# Altium PCB ntk2_agp_UIC1203R_mini.PcbDoc
Units mil, origin at the board's own origin, x right, y up, seen from the top; angles counter-clockwise.
Board outline 4519.84 x 2129.92 mil, 2 copper layers (Top Layer, Top, Bottom Layer, Bottom); 21 components, 37 nets, 174 pads, 64 vias.
Unrouted connection lines stored in the file: 2.
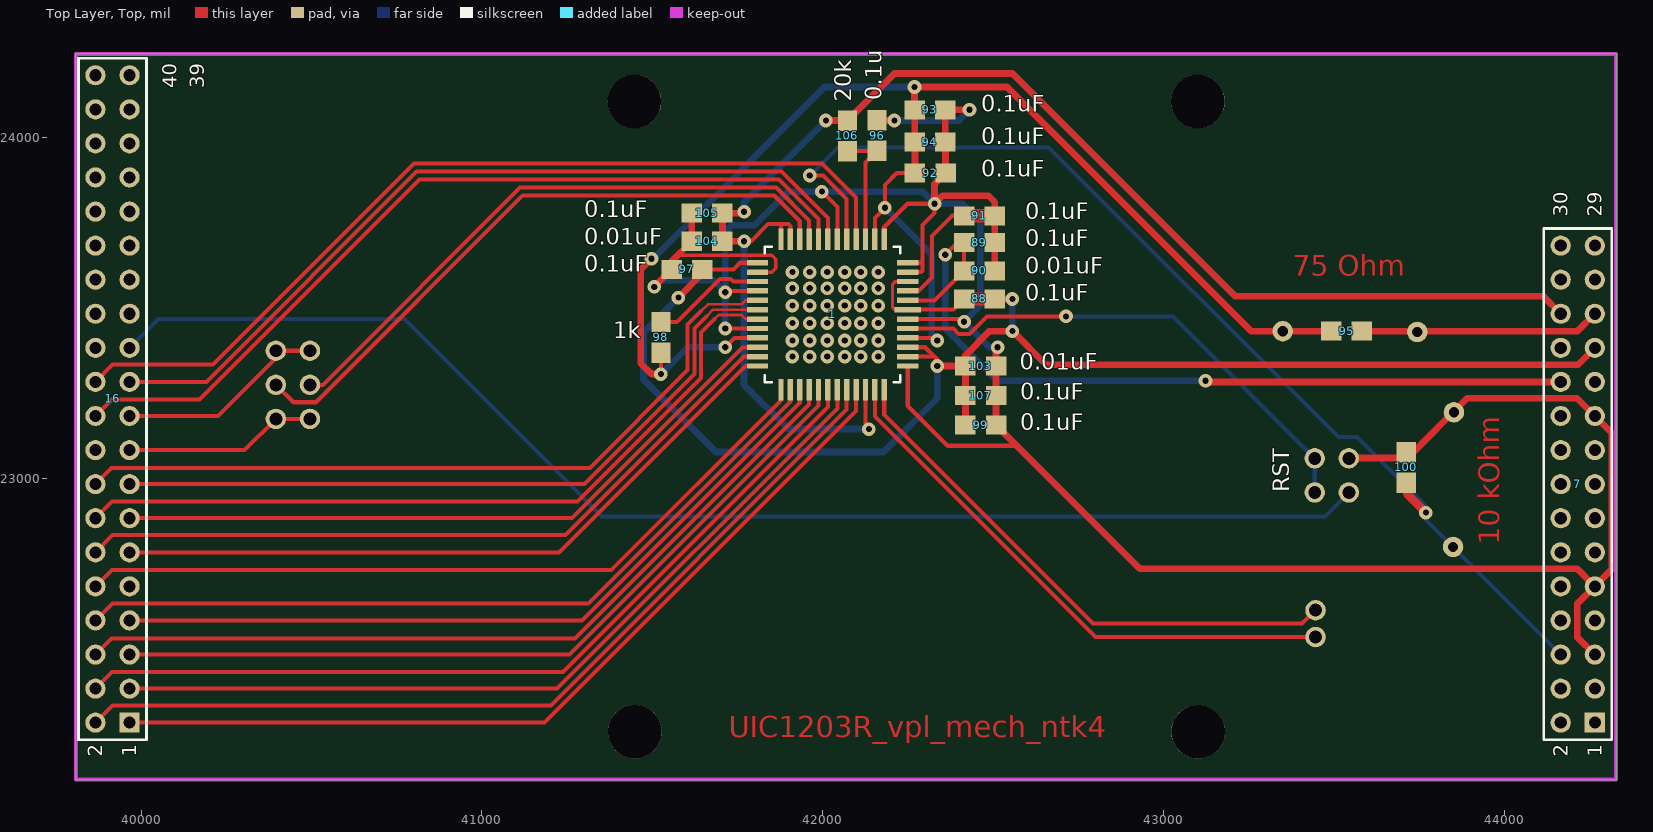
[diagram p0: Top Layer, Top view]
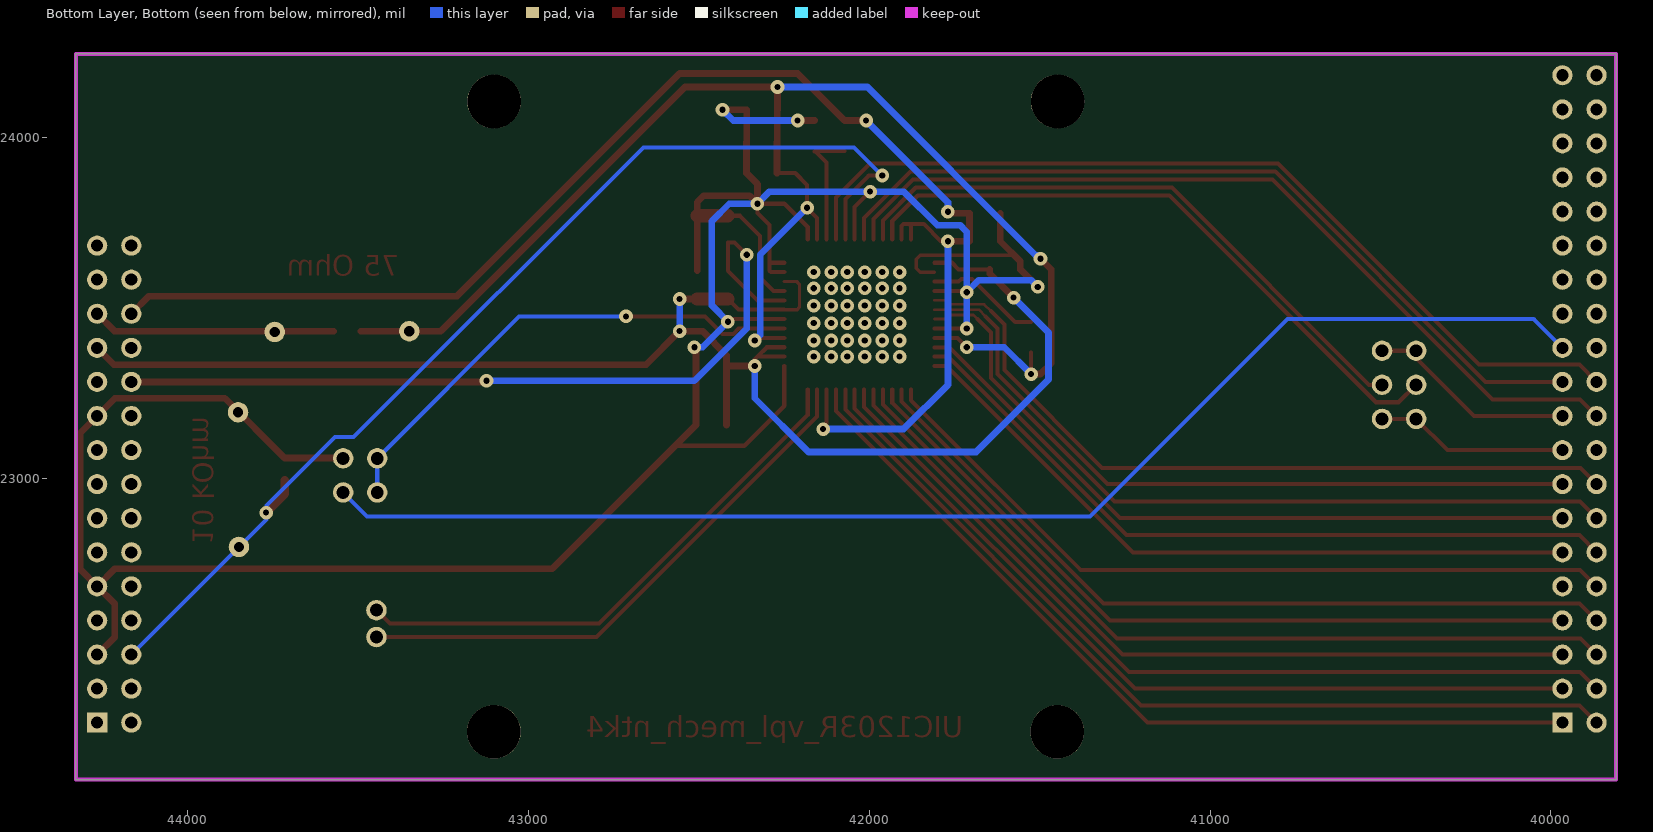
[diagram p1: Bottom Layer, Bottom view, seen from below]

## Layer stack, top to bottom
Top Solder, Top Mask: solder mask 0.4, Solder Resist, Dk 3.5
Top Layer, Top: signal copper 1.4
Dielectric 1: dielectric 12.6, FR-4, Dk 4.8
Bottom Layer, Bottom: signal copper 1.4
Bottom Solder, Bot Mask: solder mask 0.4, Solder Resist, Dk 3.5

## Board outline
39808.5,22116.06 44328.35,22116.06 44328.35,24245.98 39808.5,24245.98

## Design rules (kind name [scope] priority, off if disabled: settings)
Clearance "Clearance_Top Layer, Top_PadToPad" [ExistsOnLayer('Top Layer, Top') And IsPad vs ExistsOnLayer('Top Layer, Top') And IsPad] p1: gap=7.87
Clearance "Clearance_Top Layer, Top_PadToLine" [ExistsOnLayer('Top Layer, Top') And IsPad vs ExistsOnLayer('Top Layer, Top') And IsWire] p2: gap=7.87
Clearance "Clearance_Top Layer, Top_LineToLine" [ExistsOnLayer('Top Layer, Top') And IsWire vs ExistsOnLayer('Top Layer, Top') And IsWire] p3: gap=7.87
Clearance "Clearance_Top Layer, Top_ViaToPad" [ExistsOnLayer('Top Layer, Top') And IsVia vs ExistsOnLayer('Top Layer, Top') And IsPad] p4: gap=7.87
Clearance "Clearance_Top Layer, Top_ViaToLine" [ExistsOnLayer('Top Layer, Top') And IsVia vs ExistsOnLayer('Top Layer, Top') And IsWire] p5: gap=7.87
Clearance "Clearance_Top Layer, Top_ViaToVia" [ExistsOnLayer('Top Layer, Top') And IsVia vs ExistsOnLayer('Top Layer, Top') And IsVia] p6: gap=7.87
Clearance "Clearance_Bottom Layer, Bottom_PadToPad" [ExistsOnLayer('Bottom Layer, Bottom') And IsPad vs ExistsOnLayer('Bottom Layer, Bottom') And IsPad] p7: gap=7.87
Clearance "Clearance_Bottom Layer, Bottom_PadToLine" [ExistsOnLayer('Bottom Layer, Bottom') And IsPad vs ExistsOnLayer('Bottom Layer, Bottom') And IsWire] p8: gap=7.87
Clearance "Clearance_Bottom Layer, Bottom_LineToLine" [ExistsOnLayer('Bottom Layer, Bottom') And IsWire vs ExistsOnLayer('Bottom Layer, Bottom') And IsWire] p9: gap=7.87
Clearance "Clearance_Bottom Layer, Bottom_ViaToPad" [ExistsOnLayer('Bottom Layer, Bottom') And IsVia vs ExistsOnLayer('Bottom Layer, Bottom') And IsPad] p10: gap=7.87
Clearance "Clearance_Bottom Layer, Bottom_ViaToLine" [ExistsOnLayer('Bottom Layer, Bottom') And IsVia vs ExistsOnLayer('Bottom Layer, Bottom') And IsWire] p11: gap=7.87
Clearance "Clearance_Bottom Layer, Bottom_ViaToVia" [ExistsOnLayer('Bottom Layer, Bottom') And IsVia vs ExistsOnLayer('Bottom Layer, Bottom') And IsVia] p12: gap=7.87
Clearance Clearance_Design_HoleToHole [(IsVia Or IsThruPin) vs (IsVia Or IsThruPin)] p13: gap=13
Clearance [All] p14: gap=7.87
PlaneClearance [All] p1: clearance=10
PolygonConnect [All] p1: connectstyle=Relief reliefconductorwidth=10 reliefentries=4 polygonreliefangle="90 Angle" airgapwidth=10
RoutingVias [All] p1: holewidth=28 width=50 viastyle="Through Hole" minholewidth=28 minwidth=50 maxholewidth=28 maxwidth=50
SolderMaskExpansion [All] p1: expansion=4
Width [All] p1: maxlimit=39.37 minlimit=10 preferedwidth=10
28 further rules are at their usual default settings.

## Components (designator, comment, footprint, x,y, rotation, side; value= is the part's Value field where it differs from the comment)
1 "" UIC1203R 42249.61,23495.35 r270 top
7 "" HDR2X15_HDR2X15(Primary) 44265.87,22283.41 r90 top
16 "" HDR2X20_HDR2X20(Primary) 39965.87,22283.41 r90 top
88 "" CHIP_RESISTOR 42414.96,23526.85 r0 top
89 "" CHIP_RESISTOR 42414.96,23692.2 r0 top
90 "" CHIP_RESISTOR 42414.96,23609.53 r0 top
91 "" CHIP_RESISTOR 42414.96,23770.94 r0 top
92 "" CHIP_RESISTOR 42360.63,23896.14 r180 top
93 "" CHIP_RESISTOR 42359.84,24081.97 r180 top
94 "" CHIP_RESISTOR 42359.84,23987.48 r180 top
95 "" CHIP_RESISTOR 43492.64,23432.36 r0 top
96 "" CHIP_RESISTOR 42159.84,24051.26 r270 top
97 "" CHIP_RESISTOR 41556.69,23613.46 r0 top
98 "" CHIP_RESISTOR 41525.2,23369.37 r90 top
99 "" CHIP_RESISTOR 42508.86,23156.77 r180 top
100 "" CHIP_RESISTOR 43712.64,22987.64 r90 top
103 "" CHIP_RESISTOR 42508.86,23330 r180 top
104 "" CHIP_RESISTOR 41615.75,23696.14 r0 top
105 "" CHIP_RESISTOR 41615.75,23778.82 r0 top
106 "" CHIP_RESISTOR 42072.44,24050.47 r270 top
107 "" CHIP_RESISTOR 42508.86,23243.39 r180 top

## Footprints (in the part's own frame and the unit in brackets; to place one, negate y for a bottom-side part, rotate by r counter-clockwise, add the part's x,y. Pads: shape width x height; smd on the part's side, far side on the other; paste and mask are expansions set on the pad)
CHIP_RESISTOR [mil]
  rect 60x55.98 smd: 1(0,0) 2(89.96,0)
HDR2X15_HDR2X15(Primary) [mm]
  rect 1.5x1.5 hole 0.9: 1(0,0)
  round 1.5 hole 0.9: 2(0,2.54) 3(2.54,0) 4(2.54,2.54) 5(5.08,0) 6(5.08,2.54) 7(7.62,0) 8(7.62,2.54) 9(10.16,0) 10(10.16,2.54) 11(12.7,0) 12(12.7,2.54) 13(15.24,0) 14(15.24,2.54) 15(17.78,0) 16(17.78,2.54) 17(20.32,0) 18(20.32,2.54) 19(22.86,0) 20(22.86,2.54) 21(25.4,0) 22(25.4,2.54) 23(27.94,0) 24(27.94,2.54) 25(30.48,0) 26(30.48,2.54) 27(33.02,0) 28(33.02,2.54) 29(35.56,0) 30(35.56,2.54)
  silkscreen extent -1.27,-1.27 36.83,3.81
HDR2X20_HDR2X20(Primary) [mm]
  rect 1.5x1.5 hole 0.9: 1(0,0)
  round 1.5 hole 0.9: 2(0,2.54) 3(2.54,0) 4(2.54,2.54) 5(5.08,0) 6(5.08,2.54) 7(7.62,0) 8(7.62,2.54) 9(10.16,0) 10(10.16,2.54) 11(12.7,0) 12(12.7,2.54) 13(15.24,0) 14(15.24,2.54) 15(17.78,0) 16(17.78,2.54) 17(20.32,0) 18(20.32,2.54) 19(22.86,0) 20(22.86,2.54) 21(25.4,0) 22(25.4,2.54) 23(27.94,0) 24(27.94,2.54) 25(30.48,0) 26(30.48,2.54) 27(33.02,0) 28(33.02,2.54) 29(35.56,0) 30(35.56,2.54) 31(38.1,0) 32(38.1,2.54) 33(40.64,0) 34(40.64,2.54) 35(43.18,0) 36(43.18,2.54) 37(45.72,0) 38(45.72,2.54) 39(48.26,0) 40(48.26,2.54)
  silkscreen extent -1.27,-1.27 49.53,3.81
UIC1203R [mm]
  rect 0.4x2 smd: 1(0,0)
  rect 0.4x1.6 smd: 2(-0.7,0) 3(-1.4,0) 4(-2.1,0) 5(-2.8,0) 6(-3.5,0) 19(-3.5,-11.2) 20(-2.8,-11.2) 21(-2.1,-11.2) 22(-1.4,-11.2) 23(-0.7,-11.2) 24(0,-11.2) 25(0.7,-11.2) 26(1.4,-11.2) 27(2.1,-11.2) 28(2.8,-11.2) 29(3.5,-11.2) 30(4.2,-11.2) 43(4.2,0) 44(3.5,0) 45(2.8,0) 46(2.1,0) 47(1.4,0) 48(0.7,0)
  rect 1.6x0.4 smd: 7(-5.25,-1.75) 8(-5.25,-2.45) 9(-5.25,-3.15) 10(-5.25,-3.85) 11(-5.25,-4.55) 12(-5.25,-5.25) 13(-5.25,-5.95) 14(-5.25,-6.65) 15(-5.25,-7.35) 16(-5.25,-8.05) 17(-5.25,-8.75) 18(-5.25,-9.45) 31(5.95,-9.45) 32(5.95,-8.75) 33(5.95,-8.05) 34(5.95,-7.35) 35(5.95,-6.65) 36(5.95,-5.95) 37(5.95,-5.25) 38(5.95,-4.55) 39(5.95,-3.85) 40(5.95,-3.15) 41(5.95,-2.45) 42(5.95,-1.75)
  silkscreen extent -4.7,-10.65 5.4,-0.55

## Free pads (board coordinates)
  round 60 hole 38: 0(40395.28,23174.88) 0(40395.28,23274.88) 0(40395.28,23374.88) 0(40495.28,23174.88) 0(40495.28,23274.88) 0(40495.28,23374.88) 0(43444.09,22959.13) 0(43444.09,23059.13) 0(43446.46,22534.72) 0(43446.46,22613.46) 0(43544.09,22959.13) 0(43544.09,23059.13)
  round 157.48 hole 157.48 unplated: 0(41447.45,24106.41) 0(41448.35,22256.65) 0(43100.99,24106.41) 0(43101.89,22256.65)
  round 60 hole 30: 0(43745,23430) 0(43852.36,23194.17) 1(43350,23432.36) 1(43850,22799.17)

## Via types
v1: diameter 40, hole 18, Top Layer, Top to Bottom Layer, Bottom, 64 vias

## Nets (pads, with @x,y where several pads share a name; then routed paths per layer and width w, separated by ;. In a path a pad name is that pad's centre, name@x,y a point inside that pad or via, vN(x,y) a via of type N, cw(c..) or ccw(c..) an arc to the next point about the centre after c; other vN are vias at no path point)
1.8V: 1.8 1.27 1.46 7.25 92.2 93.2 94.2 95.1 95.2 98.1 pad.0@43745,23430 pad.1@43350,23432.36 | length 5083.6
  Top Layer, Top w11.81: v1(41525.2,23306.38) 98.1 ; v1(41714.17,23385.12) 41741.73,23412.68 1.27
  Top Layer, Top w12.01: 1.8 42153.15,23765.04 v1(42182.68,23794.57) ; v1@42190.55,23802.44 v1(42182.68,23794.57) ; 1.46 42328.35,23412.68 v1(42336.22,23404.8) ; 92.2 42217.32,23896.14 42182.68,23861.5 v1(42182.68,23794.57)
  Top Layer, Top w19.68: v1(41497.64,23644.96) 41466.14,23613.46 41466.14,23337.87 41497.64,23306.38 v1(41525.2,23306.38) ; 92.2 42270.67,23986.69 94.2 93.2 42269.29,24082.56 v1(42269.29,24148.9) 42540.94,24148.9 43257.48,23432.36 95.1 ; 95.2@43572.36,23432.36 44214.82,23432.36 7.25
  Bottom Layer, Bottom w19.68: v1@41501.57,23644.96 v1(41497.64,23644.96) 41507.48,23654.8 41511.42,23654.8 42005.51,24148.9 v1(42269.29,24148.9) ; v1(41525.2,23306.38) 41603.94,23385.12 v1(41714.17,23385.12) ; v1(42182.68,23794.57) 42320.47,23656.77 42320.47,23420.55 v1(42336.22,23404.8)
1.8VA: 1.19 1.43 1.44 1.45 7.23 88.2 97.2 99.2 103.2 107.2 | length 4729.9
  Top Layer, Top w12.01: 97.2 41737.8,23613.46 41757.48,23633.15 1.19 ; 1.43 42249.61,23213.39 42367,23096 42568.63,23096 ; 1.44 42328.44,23357.56 ; 1.45 42300.88,23385.12 42328.44,23357.56 ; v1(42336.22,23330) 42336.22,23349.78 42328.44,23357.56
  Top Layer, Top w19.68: v1(41576.38,23530.79) 41646.65,23601.06 97.2 ; v1(42336.22,23330) 103.2 ; 99.2 103.2 ; 88.2 v1(42556.69,23526.85) ; 7.23 44216.39,23333.94 42655.12,23333.94 v1(42556.69,23432.36) 42489.76,23432.36 42418.9,23361.5 103.2
  Bottom Layer, Bottom w19.68: v1(41576.38,23530.79) 41474.02,23428.43 41474.02,23290.63 41686.61,23078.03 42178.74,23078.03 42336.22,23235.51 v1(42336.22,23330) ; v1(42556.69,23432.36) v1(42556.69,23526.85)
3,3V: 1.17 1.18 1.40 7.26 104.2 105.2 106.1 | length 4375.4
  Top Layer, Top w11.81: 1.40 42125.59,23154.8 v1(42135.43,23144.96)
  Top Layer, Top w12.01: 104.2 v1@41788.98,23696.14 ; v1(41769.29,23696.14) v1@41788.98,23696.14 ; 1.18 41877.56,23741.42 41883.46,23747.32 ; 1.17 41905.12,23741.42 41899.21,23747.32 41883.46,23747.32 ; v1@41788.98,23696.14 41840.16,23747.32 41883.46,23747.32
  Top Layer, Top w19.68: v1(41769.29,23696.14) 104.2 105.2 41765.35,23778.82 v1(41769.29,23782.76) ; v1(42009.45,24050.47) 106.1 42210.24,24188.27 42556.69,24188.27 43209.96,23535 44114.28,23535 7.26
  Bottom Layer, Bottom w19.68: v1(41769.29,23696.14) 41769.29,23274.88 41899.21,23144.96 v1(42135.43,23144.96) ; v1(41769.29,23782.76) 41769.29,23810.31 v1(42009.45,24050.47)
3,3VA: 1.2 7.22 89.1 90.1 | length 2447
  Top Layer, Top w12.01: 1.2 42328.35,23522.91 90.1 89.1 42395.28,23692.2 v1(42359.84,23656.77) ; 7.22@44162.99,23278.82 44165.87,23281.7 7.22
  Top Layer, Top w19.68: v1(43123.62,23286.69) 43126.9,23283.41 7.22
  Bottom Layer, Bottom w19.68: v1(42359.84,23656.77) 42359.84,23440.24 42513.39,23286.69 v1(43123.62,23286.69)
CRDY: 1.33 16.7 | length 2270.6
  Top Layer, Top w11.81: 16.7 41294.36,22583.41 41932.68,23221.73 1.33
DSYN: 1.23 16.16 | length 2244.7
  Top Layer, Top w7.87: 41643.31,23491.42 41662.99,23511.1 41761.42,23511.1 41773.23,23522.91 1.23
  Top Layer, Top w11.81: 16.16 39913.24,23030.79 41316.54,23030.79 41603.94,23318.19 41603.94,23452.05 41643.31,23491.42
GND: 1.5 1.6 1.7 1.12 1.22 1.26 1.48 7.5 7.9 7.19 89.2 90.2 91.2 92.1 93.1 94.1 96.1 97.1 99.1 100.2 103.1 104.1 105.1 107.1 pad.0@43852.36,23194.17 | length 7910.8
  Top Layer, Top w11.81: v1(41714.17,23440.24) 1.26
  Top Layer, Top w12.01: v1(41714.17,23546.54) 41718.11,23550.47 1.22 ; v1(41997.64,23841.81) 42042.91,23796.54 1.12 ; 1.7 42180.71,23737.48 42249.61,23806.38 v1(42328.35,23806.38) 42328.35,23778.82 42292.91,23743.39 42292.91,23629.21 ; 1.48 42407.09,23467.8 v1(42414.96,23459.92) ; 1.5 42288.98,23605.59 42292.91,23609.53 42292.91,23629.21 ; 1.6 42288.98,23633.15 42292.91,23629.21 ; 92.1@42359.06,23896.14 92.1
  Top Layer, Top w19.68: v1(41505.51,23562.28) 97.1 41556.69,23637.09 104.1 105.1 ; 96.1 42160.63,24050.47 v1(42210.24,24050.47) ; v1(42430.71,24081.97) 93.1 94.1 42360.63,23986.69 92.1 42328.35,23863.86 v1(42328.35,23806.38) 42351.97,23830 42485.83,23830 42504.92,23810.91 90.2 ; v1(42513.39,23385.12) 42508.86,23380.59 103.1 107.1 99.1 42930.12,22735.51 44213.77,22735.51 7.9 ; 43544.09,23060 43715.83,23060 43891.34,23235.51 44213.77,23235.51 7.19 44316.54,23132.75 44316.54,22734.08 7.9 ; 7.5 44214.17,22535.11 44214.17,22631.72 7.9
  Bottom Layer, Bottom w19.68: v1(41505.51,23562.28) 41525.2,23581.97 41678.74,23581.97 v1(41714.17,23546.54) ; v1(41714.17,23440.24) v1(41714.17,23546.54) ; v1(42210.24,24050.47) 42399.21,24050.47 v1(42430.71,24081.97) ; v1(42513.39,23385.12) 42489.76,23385.12 v1(42414.96,23459.92) 42462.2,23507.17 42462.2,23755.2 42411.02,23806.38 v1(42328.35,23806.38) 42292.91,23841.81 v1(41997.64,23841.81) 41899.21,23841.81 41800.79,23743.39 41733.86,23743.39 41714.17,23723.7 v1(41714.17,23546.54)
HSYN: 1.25 16.14 | length 2273
  Top Layer, Top w7.87: 41682.68,23467.8 41694.49,23479.61 41761.42,23479.61 41773.23,23467.8 1.25
  Top Layer, Top w11.81: 16.14 39914.82,22932.36 41281.1,22932.36 41643.31,23294.57 41643.31,23428.43 41682.68,23467.8
IN_FPGA: 16.17 pad.0@40395.28,23174.88 pad.0@40495.28,23174.88 | length 567.3
  Top Layer, Top w12.01: 16.17 40303.81,23083.41 40395.28,23174.88 pad.0@40495.28,23174.88
LED: 1.35 16.5 | length 2371.7
  Top Layer, Top w11.81: 16.5 41257.35,22483.41 41987.8,23213.86 1.35
MISO: 1.16 pad.0@40395.28,23274.88 | length 1893.9
  Top Layer, Top w12.01: pad.0@40395.28,23274.88 40446.46,23223.7 40513.39,23223.7 41119.68,23830 41857.87,23830 41932.68,23755.2 1.16
MOSI: 1.15 pad.0@40495.28,23274.88 | length 1799.8
  Top Layer, Top w12.01: pad.0@40495.28,23274.88 40533.07,23274.88 41111.81,23853.62 41863.78,23853.62 41960.24,23757.17 1.15
NET00000: pad.0@43544.09,23059.13
NRST: 1.9 96.2 106.2 | length 362.8
  Top Layer, Top w12.01: 106.2 42073.23,23961.3 96.2 ; 1.9 42125.59,23927.05 96.2 ; 96.2@42161.02,23960.12 96.2
OUT_FPGA: 16.19 pad.0@40395.28,23374.88 pad.0@40495.28,23374.88 | length 621.2
  Top Layer, Top w12.01: 16.19 40225.07,23183.41 40395.28,23353.62 40395.28,23374.88 pad.0@40495.28,23374.88
Q0: 1.29 16.12 | length 2180.6
  Top Layer, Top w11.81: 16.12 39916.39,22833.94 41245.67,22833.94 41769.29,23357.56 1.29
Q1: 1.30 16.11 | length 2069.2
  Top Layer, Top w11.81: 16.11 41226.64,22783.41 41773.23,23330 1.30
Q2: 1.28 16.13 | length 2050.6
  Top Layer, Top w11.81: 16.13 41263.65,22883.41 41765.35,23385.12 1.28
Q3: 1.31 16.10 | length 2269.4
  Top Layer, Top w11.81: 16.10 39914.03,22731.57 41379.53,22731.57 41877.56,23229.61 1.31
Q4: 1.32 16.8 | length 2340.7
  Top Layer, Top w11.81: 16.8 39915.61,22633.15 41312.6,22633.15 41905.12,23225.67 1.32
Q5: 1.34 16.6 | length 2441.9
  Top Layer, Top w11.81: 16.6 39913.24,22530.79 41273.23,22530.79 41960.24,23217.8 1.34
Q6: 1.36 16.4 | length 2543
  Top Layer, Top w11.81: 16.4 39914.82,22432.36 41237.8,22432.36 42015.35,23209.92 1.36
Q7: 1.37 16.3 | length 2472.9
  Top Layer, Top w11.81: 16.3 41220.34,22383.41 42042.91,23205.98 1.37
Q8: 1.38 16.2 | length 2644.2
  Top Layer, Top w11.81: 16.2 39916.39,22333.94 41202.36,22333.94 42070.47,23202.05 1.38
Q9: 1.39 16.1 | length 2574
  Top Layer, Top w11.81: 16.1 41183.33,22283.41 42098.03,23198.11 1.39
SCLK: 1.14 16.20 | length 2516.5
  Top Layer, Top w12.01: 16.20 39914.03,23231.57 40170.87,23231.57 40816.54,23877.24 41871.65,23877.24 41987.8,23761.1 1.14
SCS: 1.13 16.21 | length 2424.5
  Top Layer, Top w12.01: 16.21 40191.21,23283.41 40808.66,23900.87 41879.53,23900.87 42015.35,23765.04 1.13
SEU: 1.11 7.6 100.1 pad.1@43850,22799.17 | length 3250.9
  Top Layer, Top w12.01: v1(41962.2,23889.06) 42001.57,23889.06 42070.47,23820.16 1.11
  Top Layer, Top w25: 100.1@43715,22995 43715,22955 v1(43770,22900)
  Bottom Layer, Bottom w12.01: v1(41962.2,23889.06) 42044.88,23971.73 42662.99,23971.73 43513.39,23121.34 43568.5,23121.34 43769.29,22920.55 43769.29,22879.99 7.6
TD1: 1.42 pad.0@43446.46,22613.46 | length 1610.4
  Top Layer, Top w11.81: 1.42 42180.71,23186.3 42792.91,22574.09 43407.09,22574.09 pad.0@43446.46,22613.46
TD2: 1.41 pad.0@43446.46,22534.72 | length 1640.3
  Top Layer, Top w11.81: 1.41 42153.15,23182.36 42800.79,22534.72 pad.0@43446.46,22534.72
VE: 1.21 98.2 | length 339.2
  Top Layer, Top w12.01: 98.2 41571.85,23459.33 41698.43,23585.91 41729.92,23585.91 41737.8,23578.03 1.21
VRST: 1.47 pad.0@43444.09,22959.13 pad.0@43444.09,23059.13 | length 1494.7
  Top Layer, Top w12.01: 1.47 42383.46,23440.24 42399.21,23424.49 42430.71,23424.49 42481.89,23475.67 v1(42714.17,23475.67)
  Bottom Layer, Bottom w12.01: v1(42714.17,23475.67) 43027.56,23475.67 43444.09,23059.13 pad.0@43444.09,22959.13
VRST_D: 16.23 pad.0@43544.09,22959.13 | length 3881.9
  Bottom Layer, Bottom w12.01: 16.23 40050.25,23467.8 40773.23,23467.8 41351.97,22889.06 43474.02,22889.06 pad.0@43544.09,22959.13
VSYN: 1.24 16.15 | length 2133.3
  Top Layer, Top w7.87: 41659.06,23475.67 41678.74,23495.35 1.24
  Top Layer, Top w11.81: 16.15 41300.66,22983.41 41623.62,23306.38 41623.62,23440.24 41659.06,23475.67
VTX: 1.3 91.1 | length 418.1
  Top Layer, Top w12.01: 1.3 42281.1,23550.47 42320.47,23589.84 42320.47,23711.89 42379.53,23770.94 91.1
  Top Layer, Top w39.37: 91.1 42504.92,23770.94
VW: 1.1 88.1 | length 431.7
  Top Layer, Top w10: 1.1 42211.65,23495.35 42205,23502 42205,23570 42213.03,23578.03 42249.61,23578.03
  Top Layer, Top w12.01: 1.1 42383.46,23495.35 88.1
  Top Layer, Top w39.37: 88.1 42504.92,23526.85
XI: 1.10 16.22 | length 2661.3
  Top Layer, Top w12.01: 16.22 39916.39,23333.94 40210.24,23333.94 40800.79,23924.49 41997.64,23924.49 42098.03,23824.09 1.10
pads on no net: 1.4 1.20 7.1 7.2 7.3 7.4 7.7 7.8 7.10 7.11 7.12 7.13 7.14 7.15 7.16 7.17 7.18 7.20 7.21 7.24 7.27 7.28 7.29 7.30 16.9 16.18 16.24 16.25 16.26 16.27 16.28 16.29 16.30 16.31 16.32 16.33 16.34 16.35 16.36 16.37 16.38 16.39 16.40
copper on no net: | length 377.8
  Top Layer, Top w10: 41573,23655.28 41662.38,23655.28 ; 41662.65,23655 41850,23655 41862,23643 41862,23617 41850.59,23605.59 41808.66,23605.59
  other v1: 41911.02,23357.56 41962.2,23357.56 42013.39,23357.56 42064.57,23357.56 42111.81,23357.56 42162.99,23357.56 41911.02,23404.8 41962.2,23404.8 42013.39,23404.8 42064.57,23404.8 42111.81,23404.8 42162.99,23404.8 41911.02,23455.98 41962.2,23455.98 42013.39,23455.98 42064.57,23455.98 42111.81,23455.98 42162.99,23455.98 41911.02,23507.17 41962.2,23507.17 42013.39,23507.17 42064.57,23507.17 42111.81,23507.17 42162.99,23507.17 41911.02,23558.35 41962.2,23558.35 42013.39,23558.35 42064.57,23558.35 42111.81,23558.35 42162.99,23558.35 41911.02,23605.59 41962.2,23605.59 42013.39,23605.59 42064.57,23605.59 42111.81,23605.59 42162.99,23605.59

## Keep-outs
Keep-Out Layer, Board:
  lines w5: 39808.5,22116.06 44328.35,22116.06 44328.35,24245.98 39808.5,24245.98 39808.5,22116.06
  lines w11.81: 39808.5,22116.06 44328.35,22116.06 44328.35,24245.98 39808.5,24245.98 39808.5,22116.06

## Other copper
Top Layer, Top:
  text "75 Ohm" at 43380,23595 h60
  text "10 kOhm" at 43985,22805 h60 r90
  text "UIC1203R_vpl_mech_ntk4" at 41725,22240 h62.5

## Silkscreen, mask and mechanical layers (free items; w line width, h text height)
Top Overlay, Top Silk:
  text "0.1u" at 42190,24110 h83.33 r90
  text "20k" at 42100,24105 h83.33 r90
  text "0.1uF" at 42465,24060 h83.33
  text "0.1uF" at 42465,23965 h83.33
  text "0.1uF" at 42464.96,23870 h83.33
  text "0.1uF" at 41300,23750 h83.33
  text "0.1uF" at 42595,23745 h83.33
  text "0.01uF" at 41300,23670 h83.33
  text "0.1uF" at 42595,23665 h83.33
  text "0.1uF" at 41300,23590 h83.33
  text "0.01uF" at 42595,23585 h83.33
  text "0.1uF" at 42595,23505 h83.33
  text "1k" at 41385,23395 h83.33
  text "0.01uF" at 42578.98,23302.76 h83.33
  text "0.1uF" at 42580,23215 h83.33
  text "0.1uF" at 42580,23125 h83.33
  text "RST" at 43385,22960 h83.33 r90

## Text inside footprints (layer, text, board x,y; h text height)
7: Top Overlay, Top Silk "1" at 44285.87,22183.41 h41.67 r90; Top Overlay, Top Silk "2" at 44185.87,22183.41 h41.67 r90; Top Overlay, Top Silk "29" at 44285.87,23768.41 h41.67 r90; Top Overlay, Top Silk "30" at 44185.87,23768.41 h41.67 r90
16: Top Overlay, Top Silk "1" at 39985.87,22183.41 h41.66 r90; Top Overlay, Top Silk "2" at 39885.87,22183.41 h41.66 r90; Top Overlay, Top Silk "40" at 40105,24145 h41.66 r90; Top Overlay, Top Silk "39" at 40185,24145 h41.66 r90